# EAGLE board HighRangeAccelerometer (EAGLE 6.3)
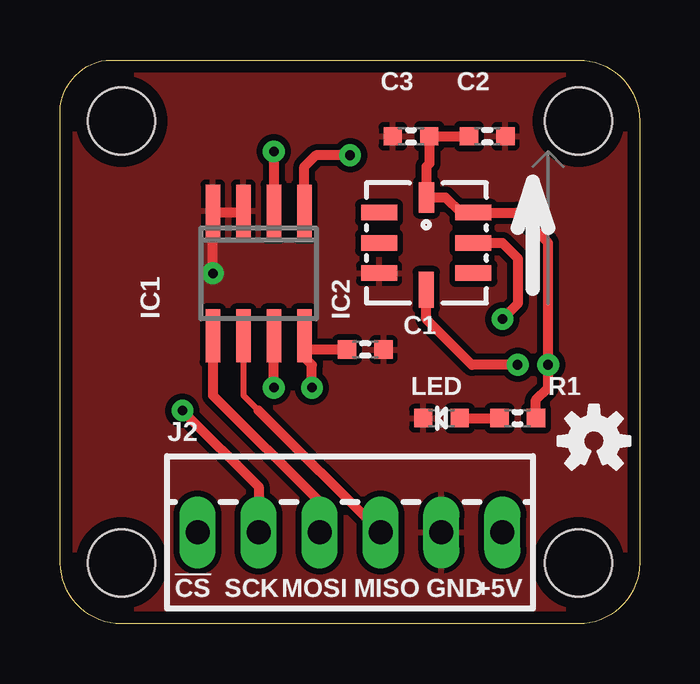
[diagram p0: board, top side]
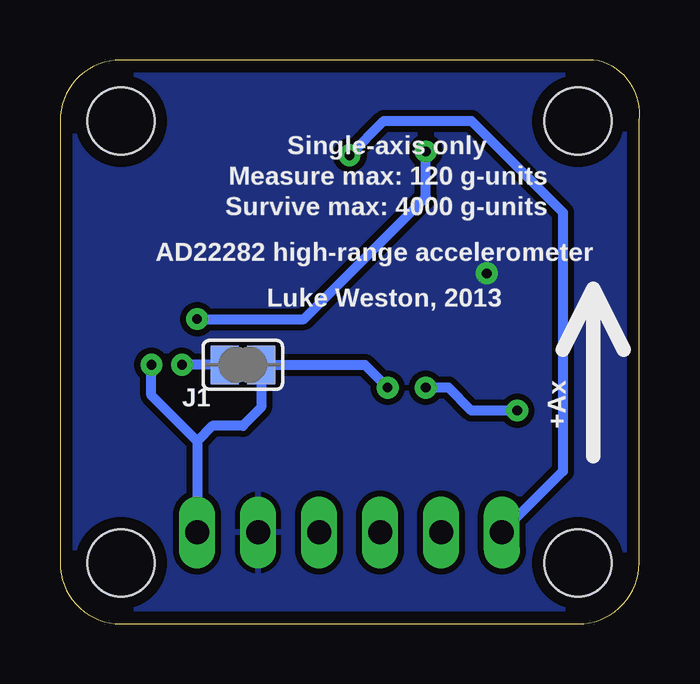
[diagram p1: board, bottom side, seen from below]

Size 24.15 x 23.5 mm. Coordinates in mm from the lower left corner, seen from the top.
Outline: 1.93,23.5 21.61,23.5 arc-90 24.15,20.96 24.15,2.54 arc-90 21.61,0 2.56,0 arc-90 0.02,2.54 0.02,20.96 arc-90 1.93,23.5
Copper layers (1*16): Top 0.035mm / dielectric 1.5mm / Bottom 0.035mm
Design rules "PCBCart-Standard *": minimum track width 8mil, minimum drill 0.4mm, track to track 8mil, track to pad 8mil, pad to pad 8mil, via to via 8mil, smd to smd 8mil, copper to edge 20mil, drill to drill 8mil, minimum pad ring 8mil, minimum via ring 10mil, stop-mask expansion 3mil, vias tented up to drill 16mil, thermal gap 8mil
Holes 2.8 mm at 21.61,2.54 2.56,20.96 2.56,2.54 21.61,20.96

## Footprints (pad centres in the part's own frame; a part is rotated, then mirrored left to right if it is on the bottom)
0603 = smd 0.762 x 0.762: 1 -0.762,0; 2 0.762,0
SO-08 = smd 0.6 x 2.2: 1 -1.905,-2.6; 2 -0.635,-2.6; 3 0.635,-2.6; 4 1.905,-2.6; 5 1.905,2.6; 6 0.635,2.6; 7 -0.635,2.6; 8 -1.905,2.6
ADXL193 = smd 1.5 x 0.64: P$1 -1.96,1.26; P$2 -1.96,0; P$3 -1.96,-1.26; P$5 1.96,-1.26; P$6 1.96,0; P$7 1.96,1.26 | smd 0.64 x 1.5: P$4 0,-1.96 | smd 0.64 x 1.27: P$8 0.01,1.9
SJ = smd 1.168 x 1.6: 1 -0.762,0; 2 0.762,0
22-23-2061 = drill 1 long: 1 -6.35,0; 2 -3.81,0; 3 -1.27,0; 4 1.27,0; 5 3.81,0; 6 6.35,0
LED-0603 = smd 0.762 x 0.762: A -0.762,0; C 0.762,0

## Placement (x,y rotation side)
C1  100nF  [0603]  12.72,11.43 180 top
C2  100nF  [0603]  17.8,20.32 180 top
C3  1µF  [0603]  14.63,20.32 0 top
IC1  MCP3202-CI/SN  [SO-08]  8.28,14.61 180 top
IC2  AD22282-A-R2  [ADXL193]  15.26,15.88 0 top
J1  Self-test  [SJ]  16.53,10.79 0 bottom
J2  Interface  [22-23-2061]  12.09,3.81 0 top
LED  Power  [LED-0603]  15.9,8.57 180 top
R1  1kΩ  [0603]  19.07,8.57 0 top
SY  OSHW-LOGOS  [OSHW-LOGO-S]  22.25,7.62 0 top

## Library data of the parts
C1-C3 R1 = freetronics-master-v1; PACKAGE: 0603
IC1 = microchip-update; PACKAGE: 8-SOIC
IC2 = SparkFun; PACKAGE: 8-CLCC
J1 = jumper
J2 = con-molex; MF: MOLEX; MPN: 22-23-2061; OC_FARNELL: 1462922; OC_NEWARK: 27C1933
LED = freetronics-master-v1; COLOUR: Blue; PACKAGE: 0603
SY = SparkFun

## Nets
+5V: C1.2 C2.2 C3.2 IC1.8 IC2.P$7 IC2.P$8 J1.2 J2.6 R1.2
GND: C1.1 C2.1 C3.1 IC1.3 IC1.4 IC2.P$3 J2.5 LED.C
N$11: IC1.2 IC2.P$6
N$12: LED.A R1.1
N$18: IC1.6 J2.4
N$21: IC1.5 J2.3
N$22: IC1.7 J2.2
N$23: IC1.1 J2.1
N$25: IC2.P$4 J1.1

## Tracks (layer width: path | path; a pad name or v marks a point on that pad's centre or on a via)
+5V  (via drill 0.4)
  Top 0.254: 16.69,17.15 17.21,17.15 IC2.P$7 | IC1.8 10.18,11.43 10.18,11.11 | IC2.P$8
  Top 0.406: IC2.P$7 19.08,17.14 20.34,15.88 v20.34,10.79 20.34,9.84 19.83,9.33 R1.2 | IC2.P$8 16.06,17.78 16.69,17.15 | C1.2 10.18,11.43 | v10.5,9.84 10.5,10.79 10.18,11.11 | IC2.P$8 15.26,19.05 15.39,19.18 C3.2 C2.2
  Bottom 0.406: v10.5,9.84 11.45,10.79 J1.2 15.77,9.02 16.53,8.26 17.8,8.26 18.44,7.62 | 18.44,7.62 20.34,9.53 v20.34,10.79 | 18.44,7.62 J2.6
GND  (via drill 0.4)
  Top 0.254: IC1.4 6.37,17.15 | 7.58,17.15 IC1.3
  Top 0.406: 6.37,17.15 7.58,17.15 | v6.37,14.61 IC1.4
  pour Top (isolate 0.254): -0.61,24.13 24.79,24.13 24.79,-0.64 -0.61,-0.64
  pour Bottom (isolate 0.254): -0.61,24.13 24.79,24.13 24.79,-0.64 -0.61,-0.64
N$11  (via drill 0.4)
  Top 0.406: v8.91,19.69 IC1.2 | IC2.P$6 18.44,15.88 19.07,15.24 19.07,13.33 v18.44,12.7
  Bottom 0.406: v8.91,19.69 8.91,17.78 13.99,12.7 v18.44,12.7
N$12
  Top 0.406: LED.A R1.1
N$18
  Top 0.254: IC1.6 7.64,9.53 8.28,8.89
  Top 0.406: 8.28,8.89 J2.4
N$21
  Top 0.406: IC1.5 6.37,9.53 10.82,5.08 J2.3
N$22  (via drill 0.4)
  Top 0.406: v8.91,9.84 IC1.7 | v5.1,8.89 8.28,5.71 J2.2
  Bottom 0.406: v5.1,8.89 7.01,8.89 7.96,9.84 v8.91,9.84
N$23  (via drill 0.4)
  Top 0.254: IC1.1 10.18,17.15
  Top 0.406: IC1.1 10.18,19.05 10.66,19.53 v12.09,19.53
  Bottom 0.406: v12.09,19.53 10.66,20.96 7.01,20.96 3.2,17.15 3.2,6.35 J2.1
N$25  (via drill 0.4)
  Top 0.406: v19.07,10.79 17.17,10.79 15.26,12.7 IC2.P$4
  Bottom 0.406: J1.1 v19.07,10.79

## Text on the board
tPlace: !CS | SCK | MOSI | MISO | GND | +5V
bPlace: Single-axis only | Measure max: 120 g-units | Survive max: 4000 g-units | AD22282 high-range accelerometer | Luke Weston, 2013 | +Ax